# Altium PCB BHL_Compass.PcbDoc
Units mm, origin at the board's own origin, x right, y up, seen from the top; angles counter-clockwise.
Board outline 10.28 x 9.27 mm, 2 copper layers (Top Layer, Bottom Layer); 10 components, 17 nets, 75 pads, 7 vias.
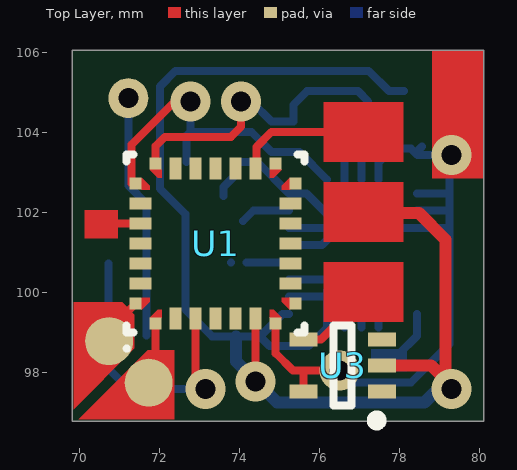
[diagram p0: Top Layer view]
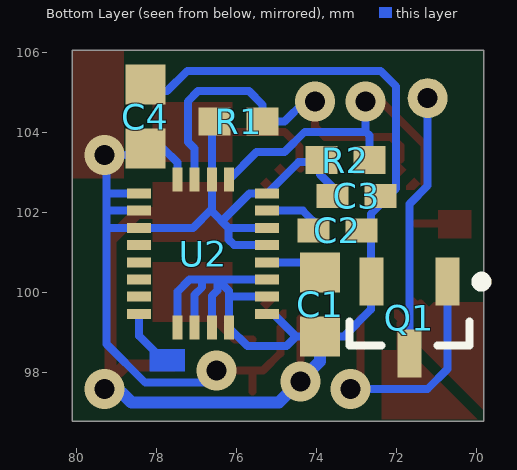
[diagram p1: Bottom Layer view, seen from below]

## Layer stack, top to bottom
Top Solder: solder mask 0.0102, Solder Resist, Dk 3.5
Top Layer: signal copper 0.0356
Dielectric1: dielectric 0.32, FR-4, Dk 4.8
Bottom Layer: signal copper 0.0356
Bottom Solder: solder mask 0.0102, Solder Resist, Dk 3.5

## Board outline
69.825,96.774 69.825,106.045 80.102,106.045 80.102,96.774

## Design rules (kind name [scope] priority, off if disabled: settings)
Clearance [All] p1: gap=0.15
HoleSize [All] p1 off: absolutevalues=TRUE maxlimit=2.54 minlimit=0.025 maxpercent=80.000 minpercent=20.000
HoleToHoleClearance [All] p1 off: gap=0.254 allowstackedmicrovias=TRUE
LayerPairs [All] p1 off: enforce=TRUE
MinimumSolderMaskSliver [All] p1 off: minsoldermaskwidth=0.254
NetAntennae [All] p1 off: netantennaetolerance=0
PlaneClearance [All] p1 off: clearance=0.508
PlaneConnect [All] p1 off: planeconnectstyle=Relief reliefexpansion=0.508 reliefentries=4 reliefconductorwidth=0.254 reliefairgap=0.254
PolygonConnect [All] p1 off: connectstyle=Relief reliefconductorwidth=0.254 reliefentries=4 polygonreliefangle="90 Angle" airgapwidth=0.254
RoutingVias [All] p1: holewidth=0.6 width=1.2 viastyle="Through Hole" minholewidth=0.4 minwidth=1 maxholewidth=0.6 maxwidth=1.2
SilkToSilkClearance [All] p1 off: silktosilkclearance=0.254
SilkToSolderMaskClearance [IsPad] p1 off: minsilkscreentomaskgap=0.254 clearancetoexposedcopper=TRUE
SolderMaskExpansion [All] p1: expansion=0.102
Width [All] p1: maxlimit=0.5 minlimit=0.2 preferedwidth=0.2
21 further rules are at their usual default settings.

## Components (designator, comment, footprint, x,y, rotation, side; value= is the part's Value field where it differs from the comment)
C1 "C0603" CAPC1608N 73.914,99.695 r90 bottom
C2 "C0603" CAPC1005N 73.482,101.549 r0 bottom
C3 "C0603" CAPC1005N 73,102.413 r0 bottom
C4 "C0603" CAPC1608N 78.283,104.394 r270 bottom
Q1 "2N7002" SOT23-3L 71.679,99.365 r270 bottom
R1 "R0603" RESC1005N 75.946,104.267 r180 bottom
R2 "R0603" RESC1005N 73.279,103.302 r180 bottom
U1 "STM8L151G6U6" UFQFPN28_V 73.406,101.219 r90 top
U2 "LSM9DS1" QFN43P350X300X100-24M 76.835,100.965 r270 bottom
U3 "TPS71530" TSOP65P210X50-5N 76.581,98.171 r180 top

## Footprints (in the part's own frame and the unit in brackets; to place one, negate y for a bottom-side part, rotate by r counter-clockwise, add the part's x,y. Pads: shape width x height; smd on the part's side, far side on the other; paste and mask are expansions set on the pad)
CAPC1005N [mm] "Chip Capacitor, Body 1.0x0.5mm, IPC Medium Density"
  rect 0.8x0.6 smd: 1(-0.6,0) 2(0.6,0)
  body extent -0.55,-0.3 0.55,0.3, height 0.6
CAPC1608N [mm] "Chip Capacitor, Body 1.6x0.8mm, IPC Medium Density"
  rect 1x1 smd: 1(-0.8,0) 2(0.8,0)
  body extent -0.87,-0.48 0.87,0.48, height 0.85
QFN43P350X300X100-24M [mm] "QFN, 24-Leads, Body 3,50x3,00mm, Pitch 0,43mm, IPC Low Density"
  rect 0.25x0.6 smd: 1(-1.505,1.6) 6(-1.505,-1.6) 7(-1.075,-1.6) 8(-0.645,-1.6) 9(-0.215,-1.6) 10(0.215,-1.6) 11(0.645,-1.6) 12(1.075,-1.6) 13(1.505,-1.6) 18(1.505,1.6) 19(1.075,1.6) 20(0.645,1.6) 21(0.215,1.6) 22(-0.215,1.6) 23(-0.645,1.6) 24(-1.075,1.6)
  rect 0.6x0.25 smd: 2(-1.85,0.645) 3(-1.85,0.215) 4(-1.85,-0.215) 5(-1.85,-0.645) 14(1.85,-0.645) 15(1.85,-0.215) 16(1.85,0.215) 17(1.85,0.645)
  body extent -1.82,-1.58 1.83,1.57, height 1
RESC1005N [mm] "Chip Resistor, Body 1.1x0.5mm, IPC Medium Density"
  rect 0.8x0.7 smd: 1(-0.6,0) 2(0.6,0)
  body extent -0.55,-0.3 0.55,0.3, height 0.4
SOT23-3L [mm] "SOT23, 3-Leads, Body 2.9x1.3mm, Pitch 0.95mm, Lead Span 2.5mm, IPC High Density"
  rect 1.2x0.6 smd: 1(-0.9,0.95) 2(-0.9,-0.95) 3(0.9,0)
  silkscreen extent -1.02,-1.5 0.7,1.92, body extent -0.7,-1.5 0.7,1.5, height 1.1
TSOP65P210X50-5N [mm] "TSOP, 5-Leads, Body 2.0x1.3mm (max), Pitch 0.65mm, IPC Medium Density"
  rect 0.7x0.35 smd: 1(-0.977,0.65) 2(-0.977,0) 3(-0.977,-0.65) 4(0.977,-0.65) 5(0.977,0.65)
  silkscreen extent -0.98,-1 0.22,1.5, body extent -0.63,-1 0.63,1, height 0.5
UFQFPN28_V [mm] "QFN, 28-Leads, Body 4x4mm, Pitch 0.5mm, ST Recommended"
  rect 0.3x0.3 smd paste+0 mask-0.15: 1(-2,1.5) 7(-2,-1.5) 8(-1.5,-2) 14(1.5,-2) 15(2,-1.5) 21(2,1.5) 22(1.5,2) 28(-1.5,2)
  rect 0.55x0.3 smd paste+0 mask+0.06: 2(-1.875,1) 3(-1.875,0.5) 4(-1.875,0) 5(-1.875,-0.5) 6(-1.875,-1) 16(1.875,-1) 17(1.875,-0.5) 18(1.875,0) 19(1.875,0.5) 20(1.875,1)
  rect 0.3x0.55 smd paste+0 mask+0.06: 9(-1,-1.875) 10(-0.5,-1.875) 11(0,-1.875) 12(0.5,-1.875) 13(1,-1.875) 23(1,1.875) 24(0.5,1.875) 25(0,1.875) 26(-0.5,1.875) 27(-1,1.875)
  Top Layer region: 1.65,-1.35 1.85,-1.35 2,-1.5 1.85,-1.65 1.65,-1.45
  Top Layer region: -1.65,-1.35 -1.85,-1.35 -2,-1.5 -1.85,-1.65 -1.65,-1.45
  Top Layer region: 1.65,1.35 1.85,1.35 2,1.5 1.85,1.65 1.65,1.45
  Top Layer region: 1.35,-1.65 1.35,-1.85 1.5,-2 1.65,-1.85 1.45,-1.65
  Top Layer region: 1.35,1.65 1.35,1.85 1.5,2 1.65,1.85 1.45,1.65
  Top Layer region: -1.35,1.65 -1.35,1.85 -1.5,2 -1.65,1.85 -1.45,1.65
  Top Layer region: -1.35,-1.65 -1.35,-1.85 -1.5,-2 -1.65,-1.85 -1.45,-1.65
  Top Layer region: -1.65,1.35 -1.85,1.35 -2,1.5 -1.85,1.65 -1.65,1.45
  silkscreen extent -2.67,-2.22 2.22,2.27, body extent -2.07,-2.07 2.07,2.07, height 0.6

## Part data
C1 C2 C3 C4: "Конденсатор"
Q1: "N-channel Enhancement Mode Field-effect Transistor"
R1 R2: "Резистор"
U1: "STM8L ARM-based EnergyLite 8-bit MCU, 32 kB Flash, 2 kB Internal RAM, -40 to +85°C Temperature, 28-pin UFQFPN, Tray"
U2: "iNEMO digital compass"
U3: "Стабилизатор"

## Free pads (board coordinates)
  round 1.2 smd: 2(70.739,98.781) 3(71.73,97.739)
  round 1 hole 0.5: 5(71.222,104.851)

## Via types
v1: diameter 1, hole 0.5, Top Layer to Bottom Layer, 7 vias

## Nets (pads, with @x,y where several pads share a name; then routed paths per layer and width w, separated by ;. In a path a pad name is that pad's centre, name@x,y a point inside that pad or via, vN(x,y) a via of type N, cw(c..) or ccw(c..) an arc to the next point about the centre after c; other vN are vias at no path point)
+3V: C3.2 C4.2 R1.1 R2.1 U1.7 U2.1 U2.3 U2.5 U2.6 U2.7 U2.8 U2.22 U2.23 U3.5 | length 27.2
  Top Layer w0.2: U1.7@74.906,99.119 74.906,98.474 75.336,98.044 75.59,98.044 ; U3.5 75.604,98.03 75.59,98.044 ; v1(76.505,98.044) 75.59,98.044
  Bottom Layer w0.2: C3.2 73.6,102.632 73.914,102.946 73.914,103.216 73.879,103.251 74.454,103.251 U2.1 75.673,102.47 76.323,101.82 ; U2.22 76.059,101.18 76.2,101.321 76.2,101.61 ; U2.23 76.2,101.61 ; v1@76.454,98.044 v1(76.505,98.044) 76.81,97.739 78.283,97.739 79.248,98.704 79.248,101.61 ; R1.1 76.62,104.193 U2.3 76.62,102.079 ; U2.5 77.48,103.241 77.833,103.594 C4.2 C4.2@78.397,103.479 ; U2.7 79.24,102.04 79.248,102.032 ; U2.6 79.204,102.47 ; C4.2@78.562,103.644 C4.2@78.397,103.479 ; 76.2,101.61 76.62,102.03 76.62,102.079 ; 76.62,102.079 77.089,101.61 U2.8 79.248,101.61 ; C4.2@78.397,103.479 78.448,103.429 79.248,103.429 79.248,102.032 ; 79.248,101.61 79.248,102.032
  other v1: 79.299,103.429
GND: C1.1 C2.1 C3.1 C4.1 Q1.2 U1.6 U2.14 U2.15 U2.16 U2.17 U2.18 U2.19 U2.20 U3.2 | length 41.3
  Top Layer w0.2: v1@74.406,97.501 v1(74.406,97.765) U1.6
  Top Layer w0.3: 77.216,101.981 78.486,101.981 79.146,101.321 v1@79.146,97.815 ; U3.2 78.791,98.171 v1@79.146,97.815 ; v1@79.146,97.765 v1@79.146,97.815
  Bottom Layer w0.2: U2.18 75.076,99.46 74.511,98.895 ; U2.19 76.147,99.89 76.19,99.847 ; U2.20 76.479,100.32 ; U2.16 76.62,99.91 76.479,100.051 76.479,100.32 ; U2.15 77.05,99.937 76.86,100.127 76.86,100.32 ; U2.14 77.48,100.015 77.175,100.32 76.86,100.32 ; C4.1@78.117,105.029 77.736,105.029 77.228,105.537 72.402,105.537 72.009,105.144 72.009,102.591 72.644,101.956 72.644,99.568 73.317,98.895 C1.1 74.511,98.895 ; 74.511,98.895 74.752,98.654 75.729,98.654 U2.17 76.19,99.847 ; 76.19,99.847 76.19,100.031 76.479,100.32 ; 76.479,100.32 76.86,100.32
  Bottom Layer w0.3: C1.1 73.914,98.273 74.943,97.244 78.626,97.244 v1@79.146,97.765
  other v1: 79.299,97.587
INT: U1.16 | length 3.4
  Top Layer w0.2: U1.16 74.422,103.11 74.422,103.632 74.803,104.013 77.089,104.013
LASER: pad.5 Q1.3 | length 6.1
  Bottom Layer w0.2: pad.5 71.222,102.667 71.679,102.21 Q1.3@71.679,98.922
LC: Q1.1 U1.3 | length 7.1
  Top Layer w0.2: U1.3 72.906,97.807 v1@73.127,97.587
  Bottom Layer w0.2: Q1.1@70.729,100.722 70.729,98.08 71.222,97.587 v1@73.127,97.587
  other v1: 73.152,97.587
NetC1_2: C1.2 U2.21 | length 1.1
  Bottom Layer w0.2: C1.2@73.787,100.749 C1.2@73.788,100.75 ; C1.2@74.169,100.75 U2.21
NetC2_2: C2.2 U2.24 | length 1.3
  Bottom Layer w0.2: C2.2@74.082,101.778 74.344,102.04 U2.24
NewNet1: U1.8
NewNet2: U1.14
NewNet3: U1.15
NewNet4: U1.24 | length 0.9
  Top Layer w0.2: 70.612,101.727 70.62,101.719 U1.24
NewNet5: U2.13 | length 1.2
  Bottom Layer w0.2: 77.965,98.438 78.435,98.907 U2.13
RESET: pad.3 U1.1 | length 1.6
  Top Layer w0.2: pad.3 71.906,97.916 U1.1
SCL: R2.2 U1.22 U2.2 | length 8.4
  Top Layer w0.2: U1.22@71.306,102.719 71.306,103.691 72.39,104.775 v1(72.771,104.775)
  Bottom Layer w0.2: R2.2@72.679,103.251 72.679,103.921 72.771,104.013 ; v1(72.771,104.775) 72.771,104.013 ; U2.2 75.5,103.505 74.803,103.505 74.295,104.013 72.771,104.013
SDA: R1.2 U1.21 U2.4 | length 9.4
  Top Layer w0.2: U1.21@71.906,103.319 71.906,103.656 72.136,103.886 73.787,103.886 74.041,104.14 v1(74.041,104.775)
  Bottom Layer w0.2: v1(74.041,104.775) 74.295,104.775 74.803,104.267 R1.2 75.346,104.683 75.692,105.029 76.962,105.029 77.216,104.775 77.216,103.759 77.05,103.593 U2.4
SWIM: pad.2 U1.28 | length 1.2
  Top Layer w0.2: pad.2 70.739,99.052 U1.28
VCC: U3.4 | length 2
  Top Layer w0.2: U3.4 76.037,98.821 77.14,99.924
pads on no net: U1.2 U1.4 U1.5 U1.9 U1.10 U1.11 U1.12 U1.13 U1.17 U1.18 U1.19 U1.20 U1.23 U1.25 U1.26 U1.27 U2.9 U2.10 U2.11 U2.12 U3.1 U3.3

## Other copper
Top Layer:
  rectangle net INT: 76.105,103.251 78.105,104.751
  rectangle net VCC: 76.105,99.251 78.105,100.751
  rectangle net GND: 76.105,101.251 78.105,102.751
  rectangle net NewNet4: 70.129,101.346 70.968,102.057
  rectangle net +3V: 78.816,102.845 80.086,106.045
  region net SWIM: 71.374,98.603 71.374,99.441 71.069,99.746 69.85,99.746 69.85,97.079
  region net RESET: 69.977,96.825 71.704,98.552 72.365,98.552 72.365,96.825
Bottom Layer:
  rectangle net NewNet5: 77.292,98.019 78.181,98.577

## Silkscreen, mask and mechanical layers (free items; w line width, h text height)
Top Solder:
  rectangle: 76.098,103.251 78.105,104.75
  rectangle: 76.098,101.244 78.105,102.768
  rectangle: 76.098,99.238 78.105,100.762
Mechanical 1:
  the board outline again, w0.3